# Altium PCB Wristband-v3.PcbDoc (part 1 of 3)
Units mil, origin at the board's own origin, x right, y up, seen from the top; angles counter-clockwise.
Board outline 1990 x 930 mil, 2 copper layers (Top Layer, Bottom Layer); 20 components, 39 nets, 136 pads, 57 vias.
Unrouted connection lines stored in the file: 2.
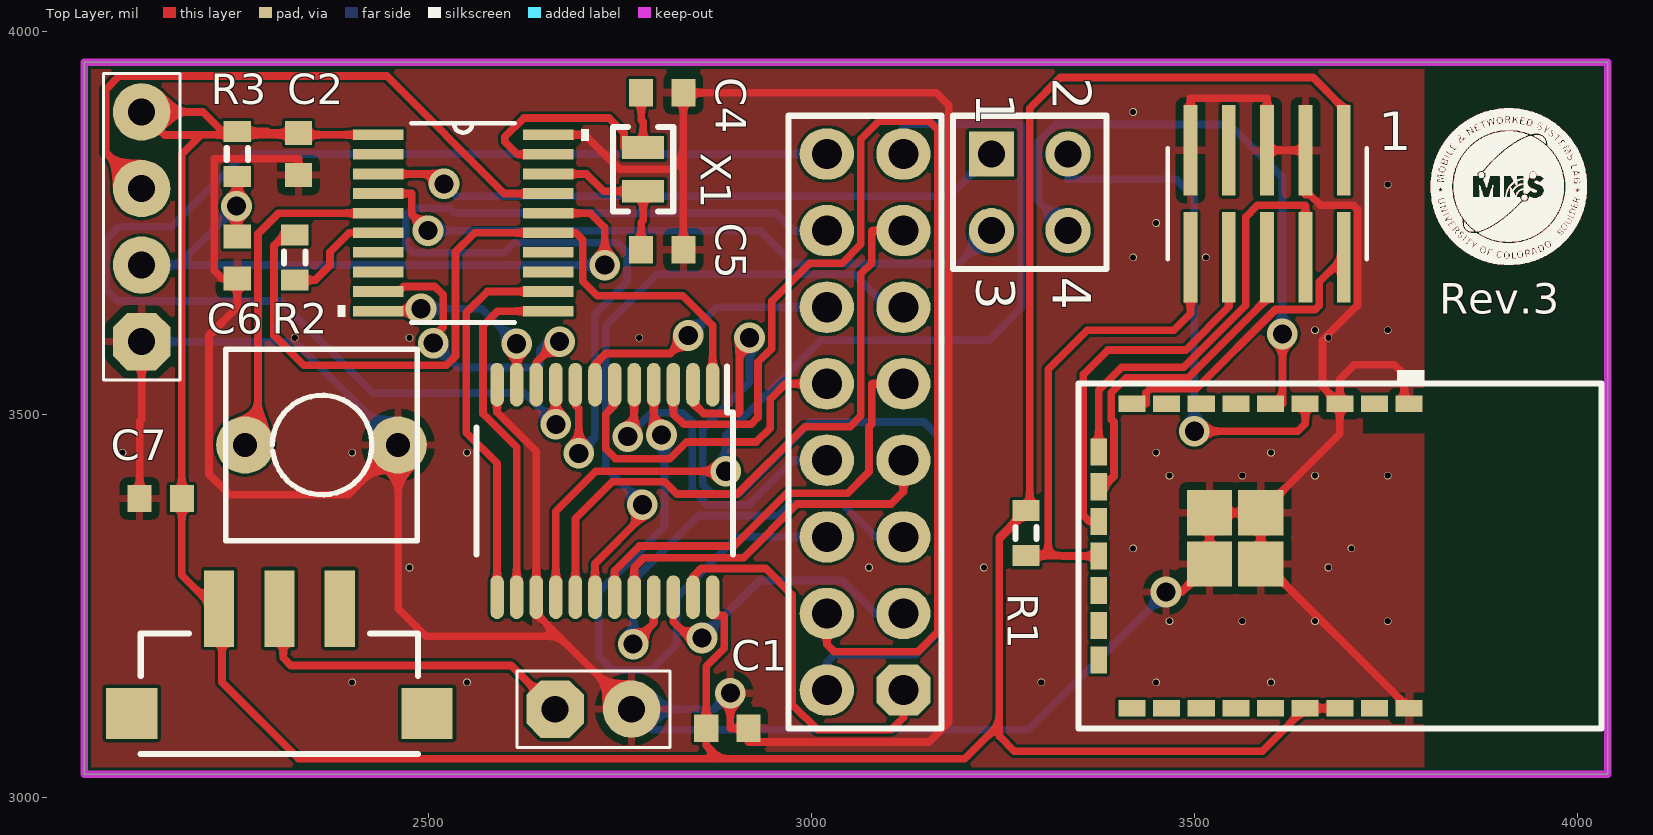
[diagram p0: Top Layer view]
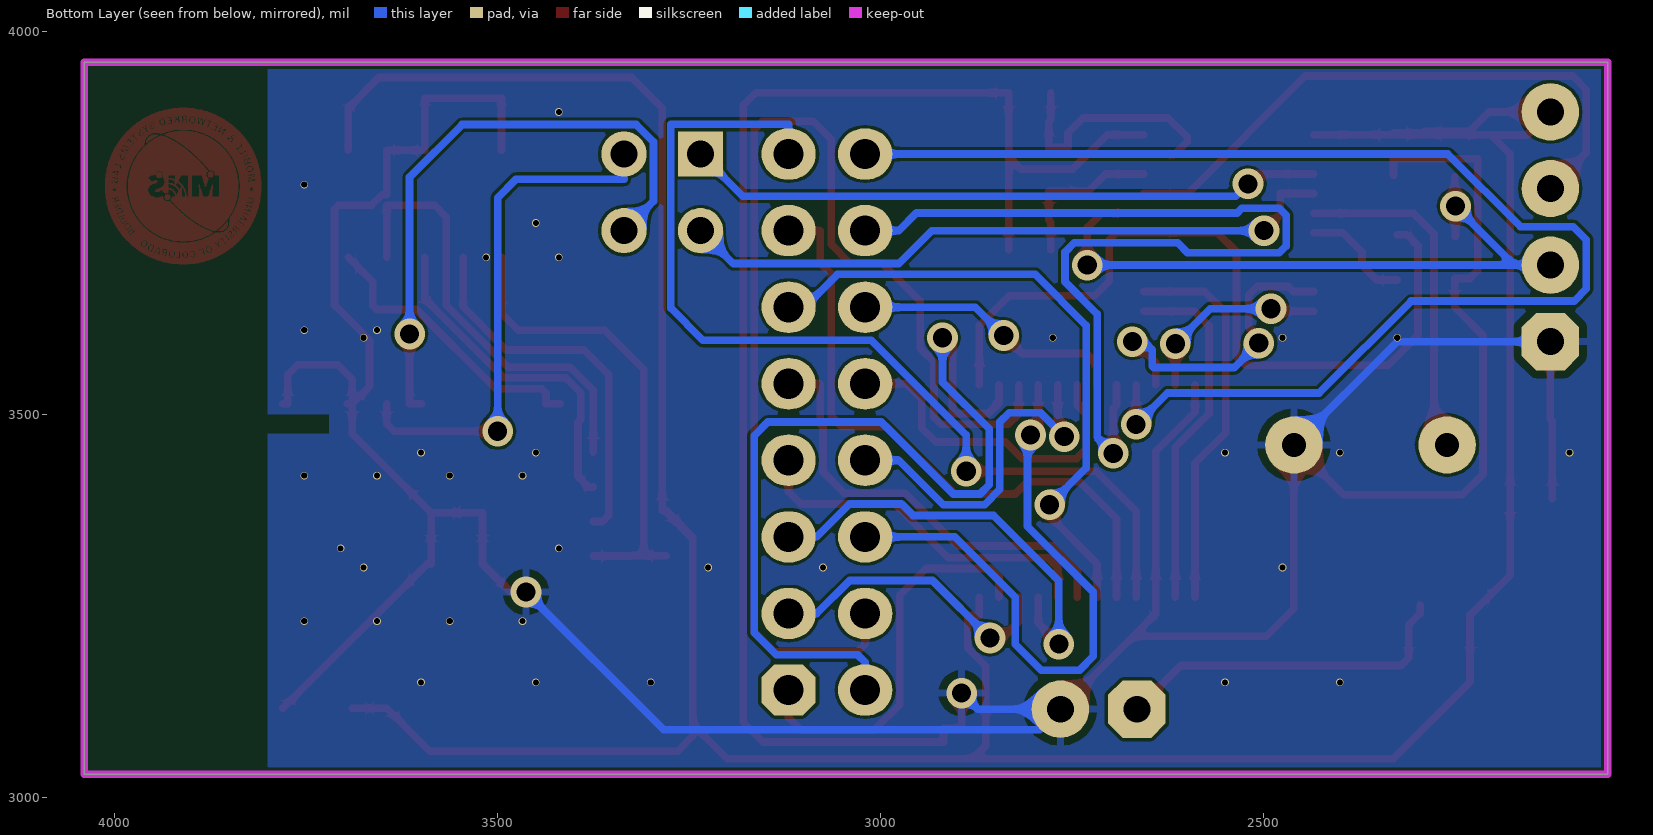
[diagram p1: Bottom Layer view, seen from below]

## Layer stack, top to bottom
Top Solder: solder mask 0.4, Solder Resist, Dk 3.5
Top Layer: signal copper 1.4
Dielectric 1: dielectric 12.6, FR-4, Dk 4.8
Bottom Layer: signal copper 1.4
Bottom Solder: solder mask 0.4, Solder Resist, Dk 3.5

## Board outline
2050,3030 2050,3960 4040,3960 4040,3030

## Design rules (kind name [scope] priority, off if disabled: settings)
Clearance [All] p1: gap=4 ignorepadtopadclearanceinfootprint=FALSE
PolygonConnect [All] p1: connectstyle=Relief reliefconductorwidth=10 reliefentries=4 polygonreliefangle="90 Angle" airgapwidth=10
RoutingVias [All] p1: holewidth=25 width=40 viastyle="Through Hole" minholewidth=28 minwidth=50 maxholewidth=28 maxwidth=50
SolderMaskExpansion [All] p1: expansion=4
Width [All] p1: maxlimit=10 minlimit=10 preferedwidth=10
30 further rules are at their usual default settings.

## Components (designator, comment, footprint, x,y, rotation, side; value= is the part's Value field where it differs from the comment)
C1 "" 1608[0603] 2890,3090 r180 top value=.1u
C2 "" 1608[0603] 2330,3840 r90 top value=.1u
C4 "" 1608[0603] 2805,3920 r180 top value=15pF
C5 "" 1608[0603] 2805,3715 r180 top value=15pf
C6 "" 1608[0603] 2250,3705 r90 top value=1000pF
C7 "" 1608[0603] 2150,3390 r0 top value=10u
H1 "Sensor Header" HD_male_8x2_100mil_straight 3070,3490 r90 top
HD1 "POWER_INPUT" HD_MALE_2 2665,3115 r0 top
HD2 "MSP_DEBUG" HD_MALE_4 2125,3595 r90 top
J1 "FTSH-105-01-F-DV" FTSH-105-01-F-DV 3595,3775 r0 top value=Value
P1 "UART" HDR2X2 3235,3840 r270 top
R1 "" J1-0603 3280,3345 r270 top value=100k
R2 "" J1-0603 2325,3705 r90 top value=5.1M
R3 "" J1-0603 2250,3840 r90 top value=47k
S1 "NKK SS312" "NKK SS312SAH4" 2305,3135 r90 top
SW1 "SW" SW2 2460,3460 r180 top value="SW chip 2 pin"
U1 "CC2650MODAMOHR" MOH0029A 3690,3315 r270 top value=Value
U2 "CD74HC4067_DB_24" DB0024A_L 2730,3400 r270 top value=Value
U3 "MSP430G2553_PW_2" PW20 2545,3750 r0 top value=Value
X1 "Crystal 32.768 k" "ABRACON ABS06" 2780,3820 r270 top value=32.768k

## Footprints (in the part's own frame and the unit in brackets; to place one, negate y for a bottom-side part, rotate by r counter-clockwise, add the part's x,y. Pads: shape width x height; smd on the part's side, far side on the other; paste and mask are expansions set on the pad)
1608[0603] [mm] "Chip Capacitor, Body 1.6x0.8mm, IPC High Density"
  rect 0.8x0.9 smd: 1(-0.7,0) 2(0.7,0)
  body extent -0.87,-0.48 0.87,0.48, height 1.3
"ABRACON ABS06" [mm] "Crystal, 2-Leads, Body 1.20x2.00mm, Pitch 1.50mm, IPC Medium Density"
  rect 0.75x1.4 smd: 1(-0.725,0) 2(0.725,0)
  silkscreen extent -1.4,-1 1.4,1, body extent -1.02,-0.62 1.03,0.63, height 0.6
DB0024A_L [mm]
  oval 1.45x0.45 smd paste+0 mask+0.051: 1(-3.525,3.575) 2(-3.525,2.925) 3(-3.525,2.275) 4(-3.525,1.625) 5(-3.525,0.975) 6(-3.525,0.325) 7(-3.525,-0.325) 8(-3.525,-0.975) 9(-3.525,-1.625) 10(-3.525,-2.275) 11(-3.525,-2.925) 12(-3.525,-3.575) 13(3.525,-3.575) 14(3.525,-2.925) 15(3.525,-2.275) 16(3.525,-1.625) 17(3.525,-0.975) 18(3.525,-0.325) 19(3.525,0.325) 20(3.525,0.975) 21(3.525,1.625) 22(3.525,2.275) 23(3.525,2.925) 24(3.525,3.575)
  silkscreen extent -4.13,-4.25 2.1,4.25, body extent 0,0 0.25,0.25, height 0.25
FTSH-105-01-F-DV [mil]
  rect 18x118 smd: 1(100,70) 2(100,-70) 3(50,70) 4(50,-70) 5(0,70) 6(0,-70) 7(-50,70) 8(-50,-70) 9(-100,70) 10(-100,-70)
  silkscreen extent -130,-72 130,72, body extent 0,0 10,10, height 10
HD_MALE_2 [mil]
  oct 75x75 hole 35: 1(0,0)
  round 75 hole 35: 2(100,0)
  silkscreen extent -50,-50 150,50, body extent -50,-50 150,50, height 334
HD_MALE_4 [mil]
  oct 75x75 hole 35: 1(0,0)
  round 75 hole 35: 2(100,0) 3(200,0) 4(300,0)
  silkscreen extent -50,-50 350,50, body extent -50,-50 350,48, height 323
HD_male_8x2_100mil_straight [mm]
  oct 1.7x1.8 hole 1: 1(-8.89,-1.27)
  oval 1.7x1.8 hole 1: 2(-8.89,1.27) 3(-6.35,-1.27) 4(-6.35,1.27) 5(-3.81,-1.27) 6(-3.81,1.27) 7(-1.27,-1.27) 8(-1.27,1.27) 9(1.27,-1.27) 10(1.27,1.27) 11(3.81,-1.27) 12(3.81,1.27) 13(6.35,-1.27) 14(6.35,1.27) 15(8.89,-1.27) 16(8.89,1.27)
  Mechanical 15 keep-out lines w0.1: -10.16,2.54 -10.16,-2.54 10.16,-2.54 10.16,2.54 -10.16,2.54
  silkscreen extent -10.16,-2.54 10.16,2.54, body extent -10.16,-2.54 10.16,2.54, height 8
HDR2X2 [mm] "Connector; Header; 2x2 Position"
  rect 1.5x1.5 hole 0.9: 1(0,0)
  round 1.5 hole 0.9: 2(0,2.54) 3(2.54,0) 4(2.54,2.54)
  silkscreen extent -1.27,-1.27 3.81,3.81
J1-0603 [mm] "Chip Resistor, Body 1.6x0.8mm, IPC High Density"
  rect 0.7x0.9 smd: 1(-0.75,0) 2(0.75,0)
  silkscreen extent -0.2,-0.35 0.2,0.35, body extent -0.85,-0.48 0.85,0.48, height 0.9
MOH0029A [mm]
  rect 0.55x0.9 smd paste+0 mask+0.051: 1(-5.05,2.3) 2(-5.05,1.15) 3(-5.05,0) 4(-5.05,-1.15) 5(-5.05,-2.3) 6(-5.05,-3.45) 7(-5.05,-4.6) 8(-5.05,-5.75) 9(-5.05,-6.9) 17(5.05,-6.9) 18(5.05,-5.75) 19(5.05,-4.6) 20(5.05,-3.45) 21(5.05,-2.3) 22(5.05,-1.15) 23(5.05,0) 24(5.05,1.15) 25(5.05,2.3)
  rect 0.9x0.55 smd paste+0 mask+0.051: 10(-3.45,-8) 11(-2.3,-8) 12(-1.15,-8) 13(0,-8) 14(1.15,-8) 15(2.3,-8) 16(3.45,-8)
  rect 1.5x1.5 smd paste-0.058 mask+0.051: 26(-1.435,-2.625) 27(-1.435,-4.325) 28(0.265,-4.325) 29(0.265,-2.625)
  silkscreen extent -6.17,-8.67 5.72,8.68, body extent -0.13,-0.13 0.13,0.13, height 0.25
"NKK SS312SAH4" [mm]
  rect 2.55x1 smd: 1(2.824,-2) 2(2.824,0) 3(2.824,2)
  rect 1.7x1.7 smd: M(-0.65,4.9) M(-0.65,-4.9)
  silkscreen extent -2,-4.6 2,4.6, body extent -3.98,-5.25 3.42,5.25, height 2.9
PW20 [mil]
  rect 66x14 smd: 1(-111,115.16) 2(-111,89.57) 3(-111,63.98) 4(-111,38.39) 5(-111,12.8) 6(-111,-12.8) 7(-111,-38.39) 8(-111,-63.98) 9(-111,-89.57) 10(-111,-115.16) 11(111,-115.16) 12(111,-89.57) 13(111,-63.98) 14(111,-38.39) 15(111,-12.8) 16(111,12.8) 17(111,38.39) 18(111,63.98) 19(111,89.57) 20(111,115.16)
  silkscreen extent -164,-130 164,130, body extent -130,-130 130,130, height 47
SW2 [mil] "SW button 2pin, 250x 250 mil"
  round 75 hole 31: 1(0,0) 2(200,0)
  silkscreen extent -25,-125 225,125

## Part data
C1 C2 C4 C5 C6 C7: library part "Cap Semi", "Capacitor (Semiconductor SIM Model)", LatestRevisionDate=29-May-2009, LatestRevisionNote="IPC-7351 Footprint Added.", PackageDescription="Chip Capacitor", PackageReference=C1206, Published=8-Jun-2000, Publisher="Altium Limited"
H1: library part HD_8x2, "Header, 8-pins/row, double row,"
HD1: library part HD_2, "Header single row 2 pins"
HD2: library part HD_4, "Header single row 4 pins"
J1: "Imported", Manufacturer_Part_Number=FTSH-105-01-F-DV-K, C="Copyright (C) 2016 Accelerated Designs. All rights reserved", Copyright="Copyright (C) 2016 Accelerated Designs. All rights reserved", RefDes=RefDes, Type=Type, Vendor=Samtec
P1: library part "Header 2X2", "Header, 2-Pin, Dual row", LatestRevisionDate=17-Jul-2002, LatestRevisionNote="Re-released for DXP Platform.", Publisher="Altium Limited"
R1 R2 R3: library part Res3, "Resistor", LatestRevisionDate=29-May-2009, LatestRevisionNote="IPC-7351 Footprint Added.", PackageDescription="Chip Resistor", PackageReference=J1-0603, Published=8-Jun-2000, Publisher="Altium Limited"
SW1: library part SW2, "Switch button 2 pin"
U1: "Imported", Manufacturer="Texas Instruments", PartNumber=CC2650MODAMOHR, RefDes=RefDes, Type=TYPE
U2: library part CD74HC4067_DW_24, "Imported", Manufacturer="Texas Instruments", PACKAGE_DESIGNATOR=DW, Datasheet_URL=http://www.ti.com/lit/gpn/CD74HC4067, FAMILY_NAME="ANALOG SWITCH/MULTIPLEXER(less than or equal to 5V)", GENERIC_PART_NUMBER=CD74HC4067, INDUSTRY_STD_PKG_TYPE=SOIC, PIN_COUNT=24, RefDes=RefDes, Type=Type
U3: "Imported", Manufacturer="Texas Instruments", Manufacturer_Part_Number=msp430g2553_pw_20, PACKAGE_DESIGNATOR=PW, Datasheet_URL=http://www.ti.com/lit/gpn/MSP430G2553, FAMILY_NAME="Value Line", GENERIC_PART_NUMBER=MSP430G2553, INDUSTRY_STD_PKG_TYPE=TSSOP, PIN_COUNT=20, RefDes=RefDes, Type=Type, Vendor="Texas Instruments"
X1: library part XT32k

## Via types
v1: diameter 10, hole 8, Top Layer to Bottom Layer, 35 vias
v2: diameter 40, hole 25, Top Layer to Bottom Layer, 22 vias

## Nets (pads, with @x,y where several pads share a name; then routed paths per layer and width w, separated by ;. In a path a pad name is that pad's centre, name@x,y a point inside that pad or via, vN(x,y) a via of type N, cw(c..) or ccw(c..) an arc to the next point about the centre after c; other vN are vias at no path point)
CC2650_RXD: P1.4 U1.5 | length 799.9
  Top Layer w10: U1.5@3599.45,3513.82 3615,3513.82 v2(3615,3605)
  Bottom Layer w10: P1.4@3335,3740 3296.47,3778.53 3296.47,3855.96 3319.04,3878.53 3546.47,3878.53 3615,3810 v2(3615,3605)
CC2650_TXD: P1.2 U1.4 | length 688.2
  Top Layer w10: v2(3500,3478) 3635,3478 3645,3488 3645,3513.82 U1.4@3644.72,3513.82
  Bottom Layer w10: P1.2@3335,3840 3335,3807 3476,3807 3500,3783 v2(3500,3478)
GND: C1.1 C2.1 C4.1 C5.1 C6.1 C7.1 HD1.2 HD2.1 J1.3 J1.5 J1.9 SW1.1 U1.1 U1.3 U1.25 U1.26 U1.27 U1.28 U1.29 U2.12 U2.15 U3.20 | length 6859.8
  Top Layer w10: C7.1@2122.44,3390 2122.44,3491 2125,3493.56 HD2.1@2125,3595 ; C2.1@2330,3812.44 2330,3834 2220,3834 2220,3688 2230.56,3677.44 C6.1@2250,3677.44 2250,3640 2213,3603 2213,3422 2240,3395 2395,3395 SW1.1@2460,3460 2460,3246 2496,3210 2670,3210 ; U2.12@2589.25,3538.78 2589.25,3502.75 2640.43,3451.57 U2.15@2640.43,3261.22 2640.43,3239.57 2670,3210 ; U3.20@2656,3865.16 2704,3865.16 2749.16,3820 2816,3820 2832.56,3836.56 ; HD1.2@2765,3115 2670,3210 ; C5.1@2832.56,3715 2832.56,3836.56 ; v2(2894,3136) 2894,3090 C1.1@2917.56,3090 2917.56,3072 3153,3072 3179,3098 3179,3904 3163,3920 C4.1@2832.56,3920 2832.56,3836.56 ; v2(3463,3268) 3483.16,3268 U1.28@3519.72,3304.57 U1.27@3519.72,3371.5 U1.26@3586.65,3371.5 ; J1.9@3495,3845 3495,3913 3595,3913 J1.5@3595,3845 J1.3@3645,3845 3645,3787 3650.8,3787 3664.8,3773 3707.73,3773 3713,3767.73 3713,3642.27 3667.28,3596.56 3667.28,3536.54 U1.3@3690,3513.82 ; U1.3@3696,3513.82 U1.3@3690,3513.82 ; U1.25@3780.55,3116.18 3592.17,3304.57 U1.29@3586.65,3304.57 U1.26@3586.65,3371.5 ; U1.1@3780.55,3513.82 3774,3513.82 3774,3552 3761,3565 3709,3565 3690,3546 U1.3@3690,3513.82 ; U1.26@3586.65,3371.5 3690,3474.84 U1.3@3690,3513.82
  Bottom Layer w10: HD2.1@2125,3595 2325,3595 SW1.1@2460,3460 ; v2(2894,3136) 2873,3115 HD1.2@2765,3115 2792,3088 3283,3088 v2(3463,3268)
  other v1: 2400,3150 2550,3150 3300,3150 3450,3150 3600,3150 3467.5,3230 3562.5,3230 3657.5,3230 3752.5,3230 2475,3300 3075,3300 3225,3300 3675,3300 3420,3325 3705,3325 3467.5,3420 3562.5,3420 3657.5,3420 3752.5,3420 2100,3450 2400,3450 2550,3450 3450,3450 3600,3450 2325,3600 2475,3600 2775,3600 3675,3600 3657.5,3610 3752.5,3610 3420,3705 3515,3705 3450,3750 3752.5,3800 3420,3895
I0: H1.16 U2.9 | length 1765.5
  Top Layer w10: v2(2666.02,3487) U2.9@2666.02,3538.78
  Bottom Layer w10: v2(2666.02,3487) 2625.02,3528 2427,3528 2307,3648 2094,3648 2078,3664 2078,3728 2095,3745 2164,3745 2259,3840 H1.16@3020,3840
I1: H1.14 U2.8 | length 1289.5
  Top Layer w10: U2.8@2691.61,3538.78 2691.61,3512 2696,3507.61 v2(2696,3449)
  Bottom Layer w10: v2(2696,3449) 2717,3470 2717,3631 2759,3673 2759,3712 2747,3724 2612,3724 2599,3711 2479,3711 2470,3720 2470,3760 2479,3769 2528,3769 2534,3763 2953,3763 2976,3740 H1.14@3020,3740
I2: H1.12 U2.7 | length 360.5
  Top Layer w10: U2.7@2717.2,3538.78 2717.2,3565.67 2731.05,3579.51 2815.51,3579.51 v2(2839,3603)
  Bottom Layer w10: v2(2839,3603) 2876,3640 H1.12@3020,3640
I3: H1.10 U2.6 | length 445.9
  Top Layer w10: U2.6@2742.8,3538.78 2742.8,3512.03 2731,3500.24 2731,3455 2744,3442 2815,3442 2837,3464 2928,3464 2946,3482 2946,3520 2966,3540 H1.10@3020,3540
I4: H1.8 U2.5 | length 469.4
  Top Layer w10: v2(2760,3471) 2768.39,3479.39 U2.5@2768.39,3538.78
  Bottom Layer w10: v2(2760,3471) 2791,3502 2832,3502 2844,3490 2844,3402 2864,3382 2918,3382 2976,3440 H1.8@3020,3440
I5: H1.6 U2.4 | length 809.5
  Top Layer w10: U2.4@2793.98,3538.78 2793.98,3483.02 v2(2804,3473)
  Bottom Layer w10: v2(2804,3473) 2808,3469 2808,3354 2722,3268 2722,3184 2740,3166 2790,3166 2824,3200 2824,3261 2903,3340 H1.6@3020,3340
I6: H1.4 U2.3 | length 1572.9
  Top Layer w10: U2.3@2819.57,3538.78 2819.57,3500.43 2833,3487 2921,3487 2930,3496 2930,3568 2948,3586 2948,3648 2997.53,3697.53 3040,3697.53 3064.43,3721.97 3064.43,3859.43 3088,3883 3154,3883 3165,3872 3165,3216 3139,3190 3030,3190 3020,3200 H1.4@3020,3240
I7: H1.2 U2.2 | length 1223.2
  Top Layer w10: U2.2@2845.16,3538.78 2845.16,3515 2858.92,3501.23 2904.23,3501.23 2906,3503 2906,3587 v2(2919,3600)
  Bottom Layer w10: v2(2919,3600) 2919,3542 2858,3481 2858,3408 2870,3396 2905,3396 2999,3490 3147,3490 3165,3472 3165,3215 3136,3186 3030,3186 3020,3176 H1.2@3020,3140
I8: H1.1 U2.23 | length 519.8
  Top Layer w10: U2.23@2845.16,3261.22 2845.16,3288 2855.92,3298.77 2940.23,3298.77 2975,3264 2975,3121 3008,3088 3104,3088 3120,3104 H1.1@3120,3140
I9: H1.3 U2.22 | length 390
  Top Layer w10: U2.22@2819.57,3261.22 2819.57,3229.43 2841,3208 v2(2857,3208)
  Bottom Layer w10: v2(2857,3208) 2932,3283 3040,3283 3083,3240 H1.3@3120,3240
I10: H1.5 U2.21 | length 567.4
  Top Layer w10: v2(2767,3200) 2793.98,3226.98 U2.21@2793.98,3261.22
  Bottom Layer w10: v2(2767,3200) 2767,3282.58 2852.42,3368 2957.48,3368 2972.48,3383 3040,3383 3083,3340 H1.5@3120,3340
I11: H1.7 U2.20 | length 472.4
  Top Layer w10: U2.20@2768.39,3261.22 2768.39,3300 2781.15,3312.77 2911.34,3312.77 2981.58,3383 3104,3383 3120,3399 H1.7@3120,3440
I12: H1.9 U2.19 | length 578.4
  Top Layer w10: U2.19@2742.8,3261.22 2742.8,3296 2774.8,3328 2898.58,3328 2967.58,3397 3047,3397 3075,3425 3075,3483.53 3078.43,3486.97 3078.43,3540 H1.9@3120,3540
I13: H1.11 U2.18 | length 834.8
  Top Layer w10: U2.18@2717.2,3261.22 2717.2,3305 2779,3366.8 v2(2779,3382)
  Bottom Layer w10: v2(2779,3382) 2731,3430 2731,3616 2798,3683 3056,3683 3099,3640 H1.11@3120,3640
I14: H1.13 U2.17 | length 833.3
  Top Layer w10: U2.17@2691.61,3261.22 2691.61,3363.61 2739.8,3411.8 2808,3411.8 2823.8,3396 2903,3396 2991,3484 3050.43,3484 3064.43,3498 3064.43,3683.53 3078.43,3697.53 3078.43,3740 H1.13@3120,3740
I15: H1.15 U2.16 | length 1290.9
  Top Layer w10: U2.16@2666.02,3261.22 2666.02,3373.45 2718.37,3425.8 v2(2888,3425.8)
  Bottom Layer w10: v2(2888,3425.8) 2888,3473 3012,3597 3232,3597 3274,3639 3274,3879 3120,3879 H1.15@3120,3840
MSP_RX: P1.1 U3.3 | length 835.8
  Top Layer w10: U3.3@2434,3813.98 2507.02,3813.98 v2(2520,3801)
  Bottom Layer w10: v2(2520,3801) 2536,3785 3180,3785 P1.1@3235,3840
MSP_TX: P1.3 U3.4 | length 872.7
  Top Layer w10: U3.4@2434,3788.39 2478,3788.39 2478,3761 v2(2499,3740)
  Bottom Layer w10: v2(2499,3740) 2933,3740 2976,3697 3192,3697 P1.3@3235,3740
MUX_OUTPUT: R2.2 U2.1 U3.15 | length 1049.8
  Top Layer w10: R2.2@2325,3734.53 2312,3734.53 2298,3720.53 2298,3603 2337,3564 2523,3564 2535,3576 2535,3712.2 2560,3737.2 U3.15@2656,3737.2 2691.8,3737.2 2701,3728 2701,3674 2720,3655 2831.75,3655 2870.75,3616 U2.1@2870.75,3538.78
NetHD1_1: HD1.1 S1.2 | length 458.2
  Top Layer w10: S1.2@2295,3251.2 2295,3240 2310,3225 2310,3182 2320,3172 2608,3172 HD1.1@2665,3115
NetJ1_2: J1.2 U1.9 | length 382.4
  Top Layer w10: U1.9@3418.35,3513.82 3436.91,3513.82 3436.91,3528.37 3442.18,3533.65 3502.63,3533.65 3605.99,3637 3657.73,3637 3663,3642.27 3663,3673 J1.2@3695,3705
NetJ1_4: J1.4 U1.10 | length 586.1
  Top Layer w10: U1.10@3375.04,3450.83 3375.04,3531.58 3405.1,3561.65 3486.04,3561.65 3567,3642.61 3567,3757.73 3582.27,3773 3645,3773 J1.4@3645,3705
NetJ1_6: J1.6 U1.11 | length 447.1
  Top Layer w10: U1.11@3375.04,3405.55 3375.04,3405 3384,3405 3384,3408 3395,3419 3395,3490 3391.63,3493.37 3391.63,3528.37 3410.9,3547.65 3491.84,3547.65 3595,3650.81 J1.6@3595,3705
NetJ1_8: J1.8 U1.12 | length 498.8
  Top Layer w10: U1.12@3375.04,3360.28 3375.04,3360 3363,3360 3355,3368 3355,3552 3387,3584 3488.59,3584 3545,3640.41 J1.8@3545,3705
NetJ1_10: J1.10 R1.2 U1.13 | length 628
  Top Layer w10: R1.2@3280,3315.47 3309,3315.47 ; U1.13@3375.04,3315 3327.47,3315 3327,3315.47 3309,3315.47 ; J1.10@3495,3705 3495,3632 3473,3610 3360,3610 3309,3559 3309,3315.47
NetSW1_2: SW1.2 U3.5 | length 451.1
  Top Layer w10: SW1.2@2260,3460 2277,3477 2277,3736 2303.8,3762.8 U3.5@2434,3762.8
REF_PIN: R2.1 U3.6 | length 144.8
  Top Layer w10: R2.1@2325,3675.47 2352,3675.47 2371,3694.47 2371,3712 2396.2,3737.2 U3.6@2434,3737.2
RST: C6.2 HD2.2 R3.1 U3.16 | length 925.6
  Top Layer w10: v2(2249,3772) v2@2249,3771 ; C6.2@2250,3732.56 2249,3732.56 v2@2249,3771 ; R3.1@2250,3810.47 2250,3771 v2@2249,3771 ; U3.16@2656,3762.8 2711.2,3762.8 2730,3744 v2(2730,3695)
  Bottom Layer w10: HD2.2@2125,3695 2172,3695 ; v2(2249,3772) 2172,3695 ; v2(2730,3695) 2172,3695
S0: U2.10 U3.9 | length 436.1
  Top Layer w10: U3.9@2434,3660.43 2461,3660.43 2467.57,3667 2508,3667 2519,3656 2519,3614 2506,3601 v2(2506,3593) ; U2.10@2640.43,3538.78 2640.43,3568 2667.43,3595 v2(2671,3595)
  Bottom Layer w10: v2(2506,3593) 2537.84,3561.16 2643.16,3561.16 2645,3563 2645,3584 2656,3595 v2(2671,3595)
S1: U2.11 U3.10 | length 254.5
  Top Layer w10: U3.10@2434,3634.84 2486.84,3634.84 v2(2490,3638) ; U2.11@2614.84,3538.78 v2(2614.84,3592.16)
  Bottom Layer w10: v2(2490,3638) 2569,3638 v2(2614.84,3592.16)
S2: U2.14 U3.11 | length 465.7
  Top Layer w10: U2.14@2614.84,3261.22 2614.84,3457.16 2571,3501 2571,3616 2589.84,3634.84 U3.11@2656,3634.84
S3: U2.13 U3.12 | length 506.9
  Top Layer w10: U2.13@2589.25,3261.22 2589.25,3436.01 2549,3476.26 2549,3633.06 2576.37,3660.43 U3.12@2656,3660.43
TEST: HD2.3 U3.17 | length 797.6
  Top Layer w10: HD2.3@2125,3795 2078,3842 2078,3924 2096,3942 2445,3942 2598.61,3788.39 U3.17@2656,3788.39
VCC: C1.2 C2.2 C7.2 HD2.4 J1.1 R1.1 R3.2 S1.3 U1.22 U1.23 U2.24 U3.1 | length 4516.4
  Top Layer w10: C2.2@2330,3867.56 2290.97,3867.56 2289,3869.53 R3.2@2250,3869.53 2230.47,3869.53 2205,3895 HD2.4@2125,3895 2154.84,3865.16 ; U3.1@2434,3865.16 2202.72,3865.16 2154.84,3865.16 ; U2.24@2870.75,3261.22 2870.75,3237 2886,3237 2886,3194.56 2862.44,3171 C1.2@2862.44,3090 2862.44,3067.56 2880,3050 ; 3245,3095 3200,3050 2330,3050 2230,3150 2230,3237.46 2177.56,3289.9 C7.2@2177.56,3390 2177.56,3840 2202.09,3864.53 2155.47,3864.53 2154.84,3865.16 ; 3245,3337 3280,3372 R1.1@3280,3374.53 ; U1.23@3690,3116.18 U1.22@3644.72,3116.18 3588.54,3060 3265,3060 3245,3080 3245,3339.53 R1.1@3280,3374.53 ; J1.1@3695,3845 3695,3900 3655,3940 3325,3940 3285,3900 3285,3374.53 R1.1@3280,3374.53
XIN: C4.2 U3.19 X1.1 | length 360.4
  Top Layer w10: U3.19@2656,3839.57 2615.87,3839.57 2599.43,3856 2599.43,3862.43 2624,3887 2736,3887 2755,3868 2755,3848.54 X1.1@2780,3848.54 2780,3882 2777.44,3884.56 C4.2@2777.44,3920
XOUT: C5.2 U3.18 X1.2 | length 210.8
  Top Layer w10: U3.18@2656,3813.98 2706,3813.98 2728.52,3791.46 X1.2@2780,3791.46 2780,3753.56 2777.44,3751 C5.2@2777.44,3715
pads on no net: J1.7 S1.1 S1.M U1.2 U1.6 U1.7 U1.8 U1.14 U1.15 U1.16 U1.17 U1.18 U1.19 U1.20 U1.21 U1.24 U3.2 U3.7 U3.8 U3.13 U3.14
copper on no net: | length 54748

## Text inside footprints (layer, text, board x,y; h text height)
J1: Top Overlay "1" at 3740,3845 h50; Mechanical 13 "1" at 3740,3845 h50
P1: Top Overlay "1" at 3215,3920 h50 r270; Top Overlay "2" at 3315,3940 h50 r270; Top Overlay "4" at 3315,3680 h50 r270; Top Overlay "3" at 3215,3680 h50 r270